# Altium PCB Ventilator.PcbDoc (part 1 of 2)
Units mm, origin at the board's own origin, x right, y up, seen from the top; angles counter-clockwise.
Board outline 121 x 71 mm, 4 copper layers (Top Layer, Int1 (GND), Int2 (PWR), Bottom Layer), stack 1.454 mm thick; 107 components, 73 nets, 431 pads, 141 vias.
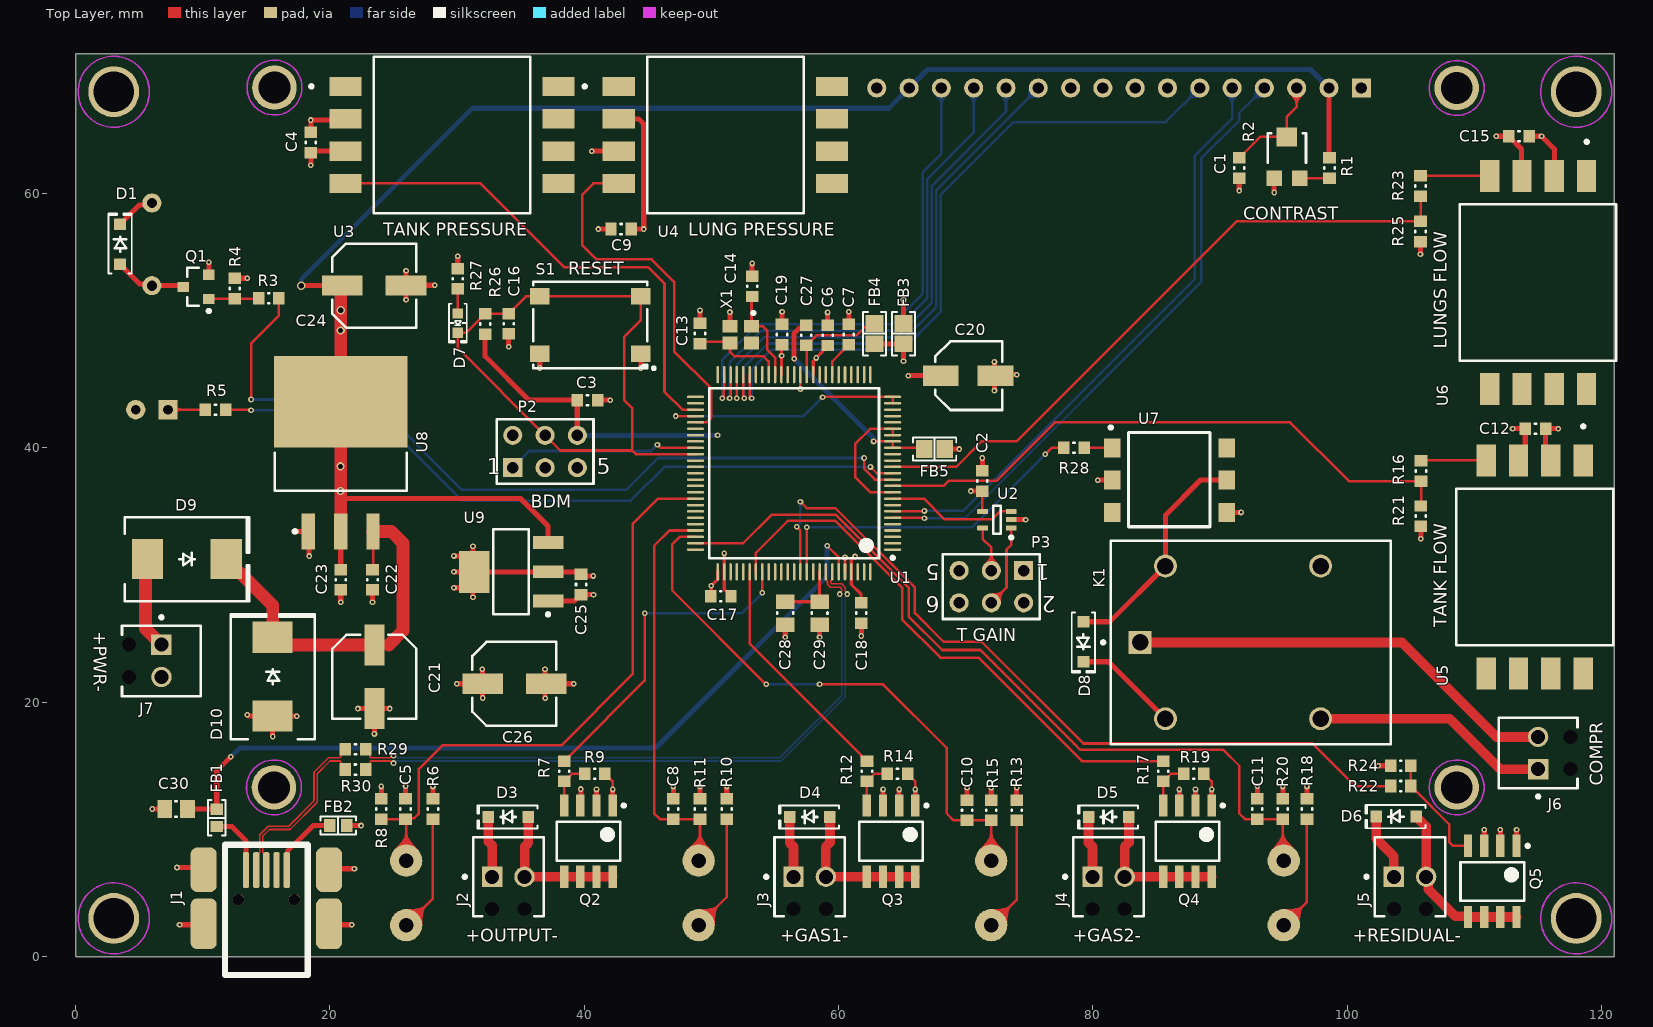
[diagram p0: Top Layer view]
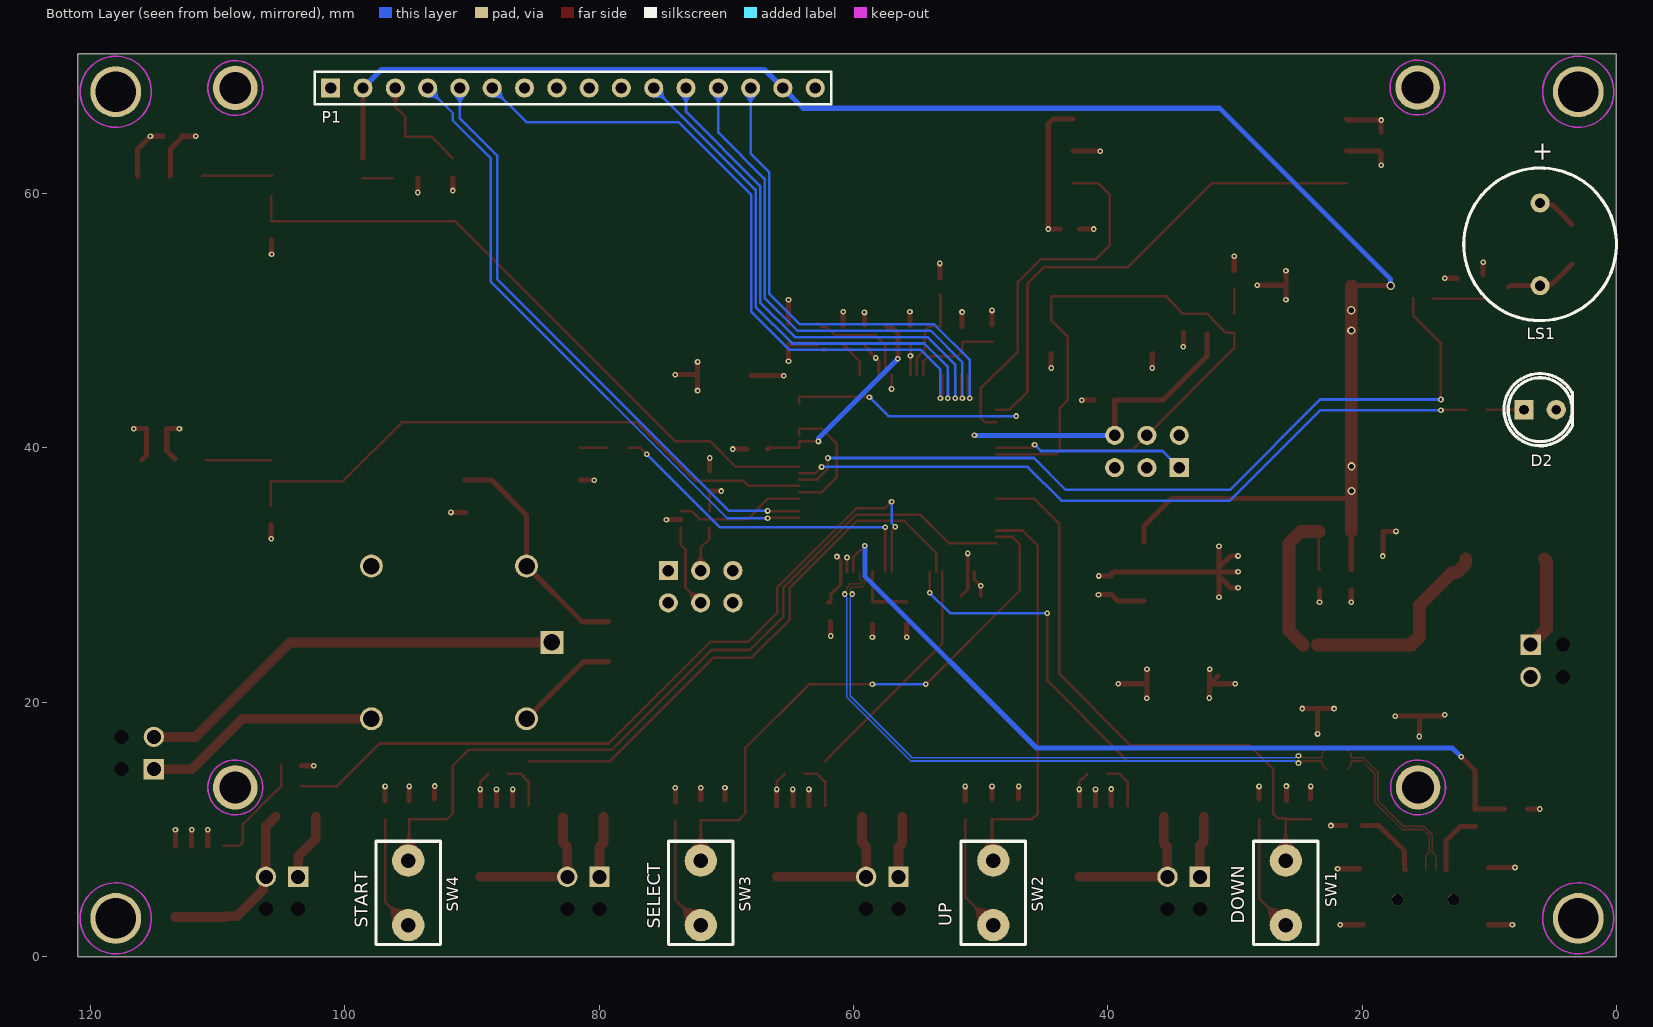
[diagram p1: Bottom Layer view, seen from below]
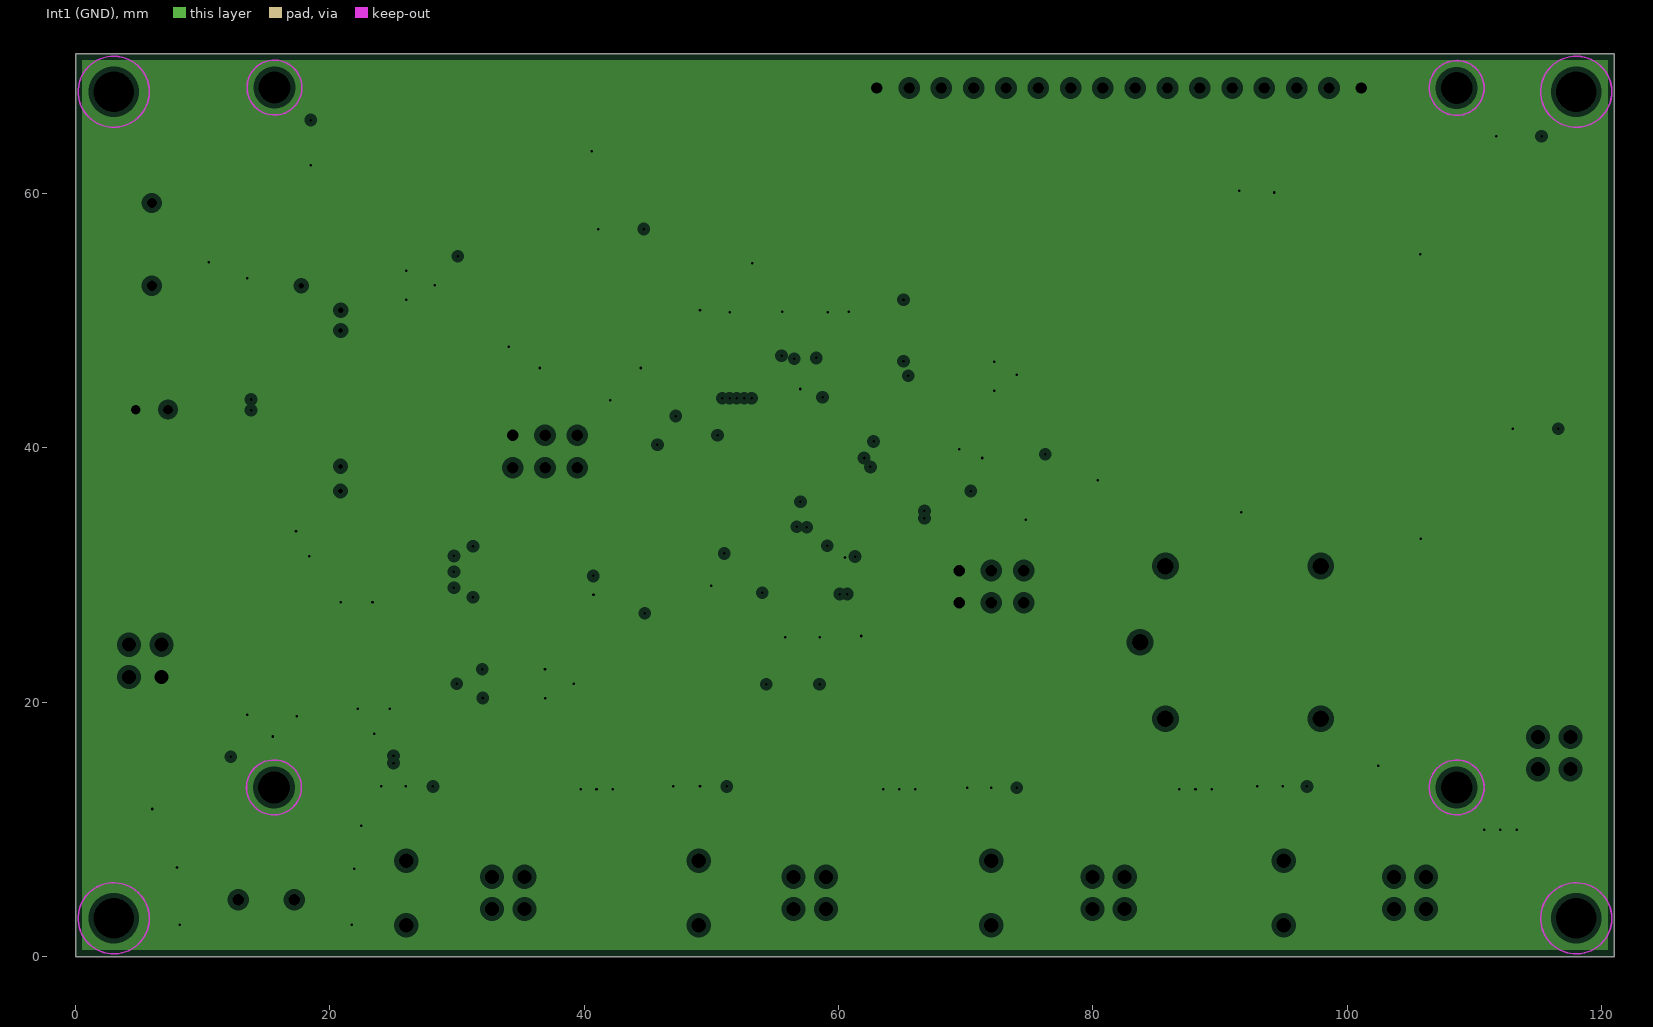
[diagram p2: Int1 (GND), clearances drawn from the general rule]
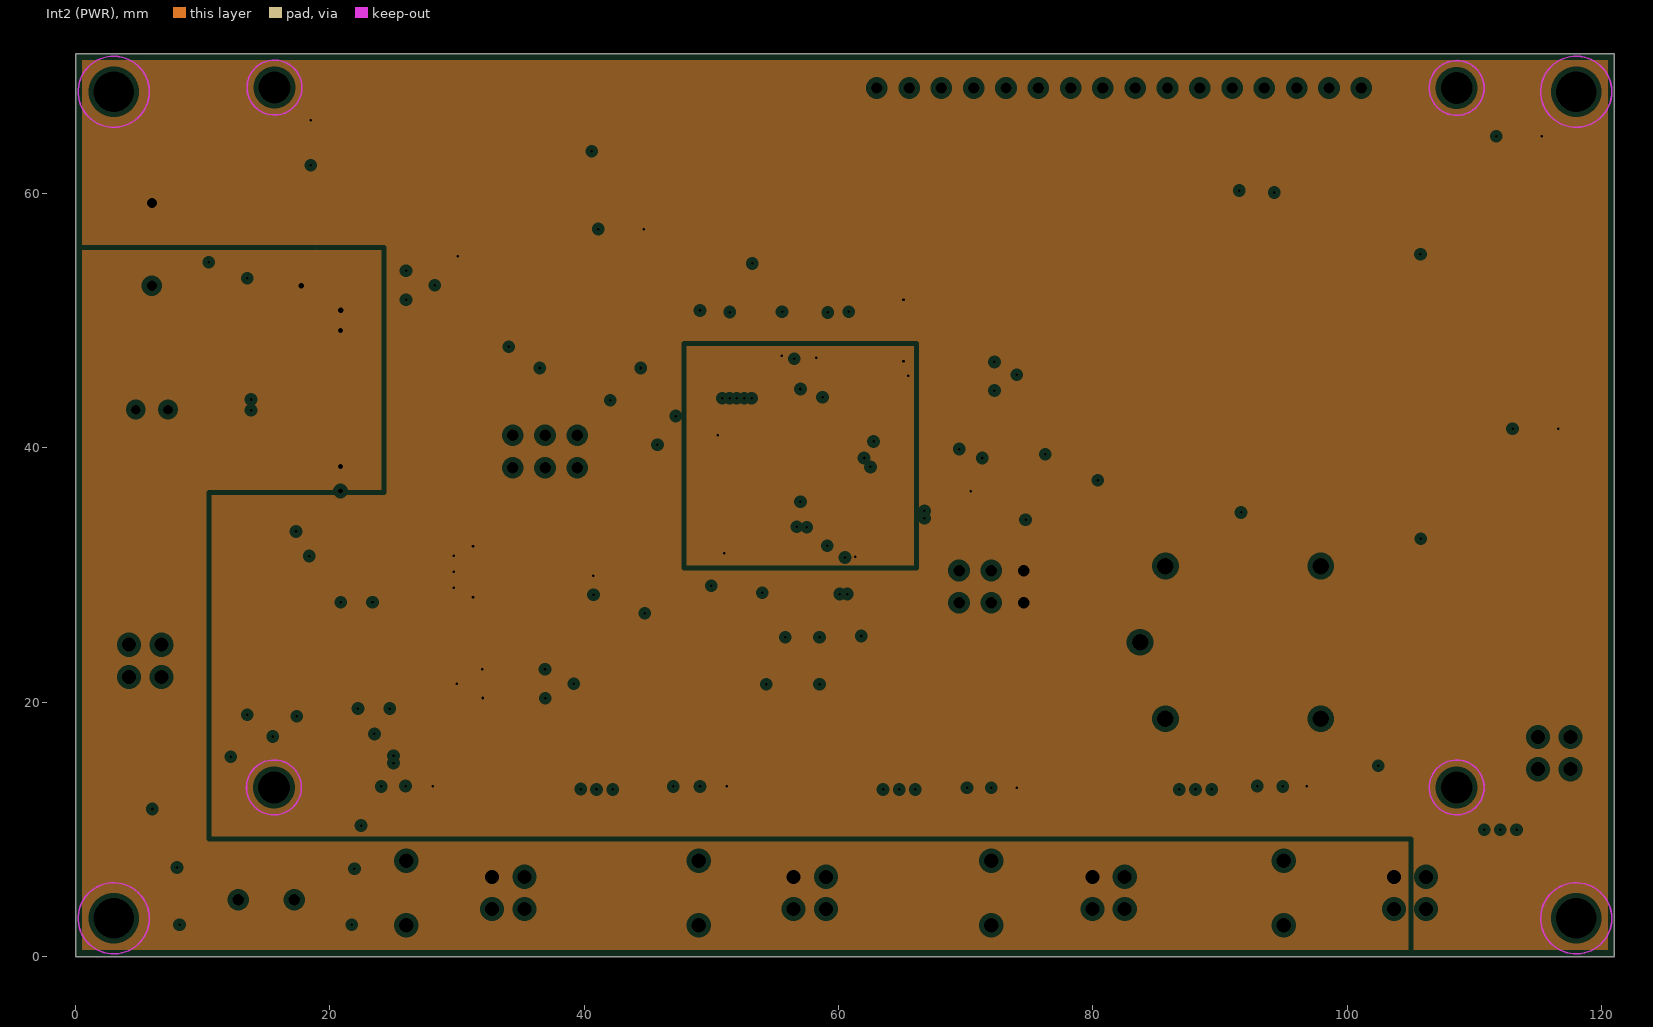
[diagram p3: Int2 (PWR), clearances drawn from the general rule]
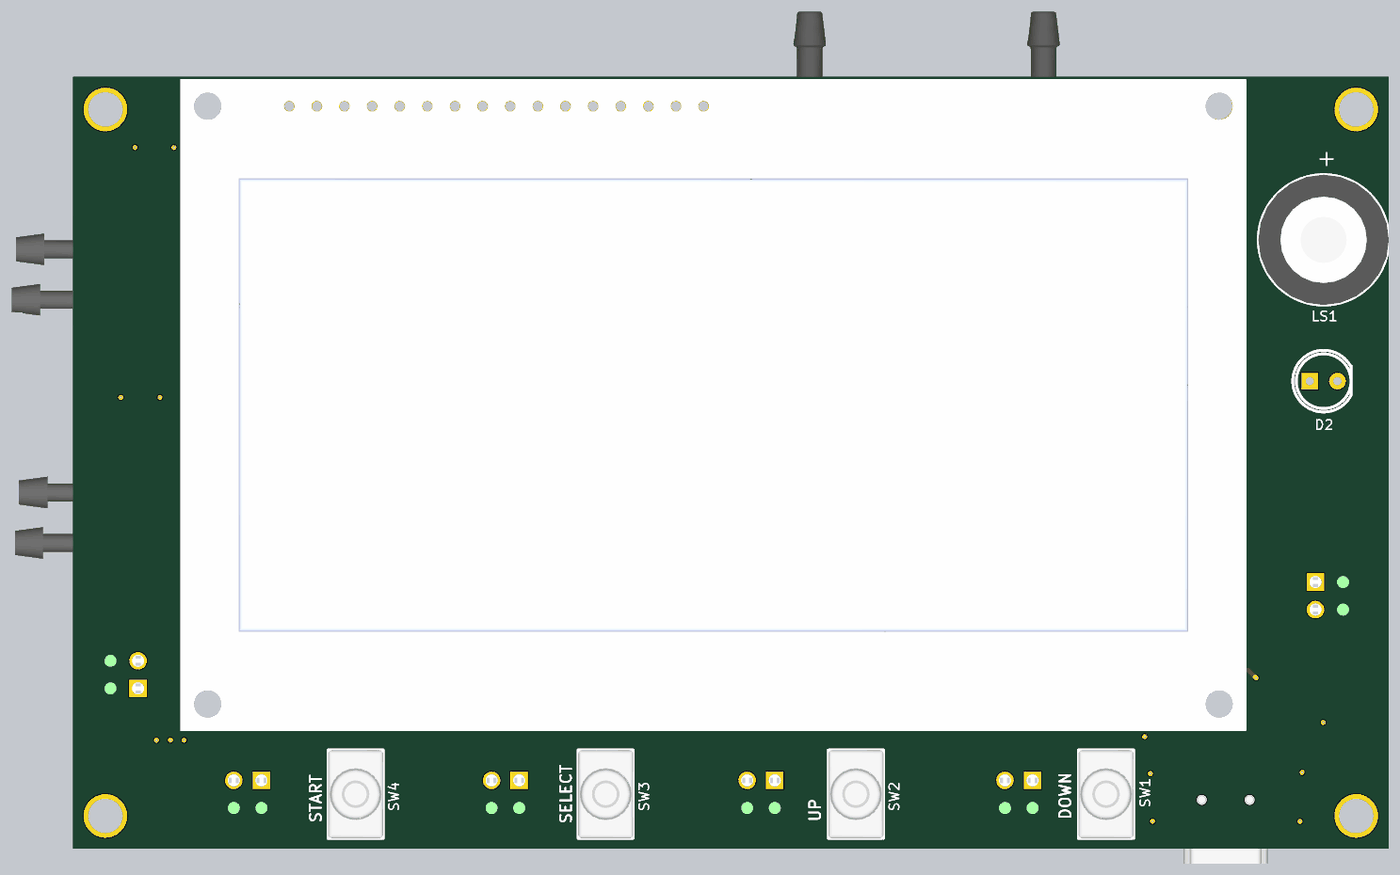
[diagram p5: 3D render of the assembled board from below, using the file's embedded part models]

## Layer stack, top to bottom
Top Solder: solder mask 0.0254, SM-001, Dk 4
Top Layer: signal copper 0.017
Dielectric 1: prepreg 0.11, PP-017, Dk 4.29
Int1 (GND): plane copper 0.035, net GND
Dielectric 3: core 1.13, Core-039, Dk 3.96
Int2 (PWR): plane copper 0.035, net (Multiple Nets)
Dielectric 5: prepreg 0.11, PP-017, Dk 4.29
Bottom Layer: signal copper 0.017
Bottom Solder: solder mask 0.0254, SM-001, Dk 4

## Board outline
0,0 0,71 121,71 121,0

## Design rules (kind name [scope] priority, off if disabled: settings)
Clearance [All] p1: gap=0.127 ignorepadtopadclearanceinfootprint=FALSE except(0: Arc-Hole Track-Hole SMDPad-Hole THPad-Hole Via-Hole Fill-Hole Poly-Hole Region-Hole Text-Hole)
ComponentClearance LEDClearance [HasFootprint('LED T-13/4')] p1: gap=0 collisioncheckmode=3 verticalgap=0 showdistances=FALSE
ComponentClearance [All] p2: gap=0.254 collisioncheckmode=3 verticalgap=0.254 showdistances=FALSE
DiffPairsRouting Diff_USB_ID [InDifferentialPair('USB_ID')] p1: maxlimit=0.127 minlimit=0.127 mostfreqgap=0.127 toplayer_minwidth=0.131 toplayer_maxwidth=0.154 toplayer_prefwidth=0.154 bottomlayer_minwidth=0.131 bottomlayer_maxwidth=0.154 bottomlayer_prefwidth=0.154 impedanceprofiledriven=TRUE impedanceprofileid={9005915C-958C-452F-89B8-649AF9CD579F} impedanceprofilevalue=90.000000 maxuncoupledlength=12.7
DiffPairsRouting Diff_USB [InDifferentialPair('USB')] p2: maxlimit=0.127 minlimit=0.127 mostfreqgap=0.127 toplayer_minwidth=0.131 toplayer_maxwidth=0.154 toplayer_prefwidth=0.154 bottomlayer_minwidth=0.131 bottomlayer_maxwidth=0.154 bottomlayer_prefwidth=0.154 impedanceprofiledriven=TRUE impedanceprofileid={9005915C-958C-452F-89B8-649AF9CD579F} impedanceprofilevalue=90.000000 maxuncoupledlength=12.7
DiffPairsRouting [All] p3: maxlimit=0.254 minlimit=0.254 mostfreqgap=0.254 toplayer_minwidth=0.381 toplayer_maxwidth=0.381 toplayer_prefwidth=0.381 bottomlayer_minwidth=0.381 bottomlayer_maxwidth=0.381 bottomlayer_prefwidth=0.381 maxuncoupledlength=12.7
PlaneClearance [All] p1: clearance=0.4
PlaneConnect [All] p1: pad.planeconnectstyle=Relief pad.reliefexpansion=0.508 pad.reliefentries=4 pad.reliefconductorwidth=0.254 pad.reliefairgap=0.254 via.planeconnectstyle=Direct via.reliefexpansion=0.508 via.reliefentries=4 via.reliefconductorwidth=0.254 via.reliefairgap=0.254
PolygonConnect [All] p1: connectstyle=Relief reliefconductorwidth=0.254 reliefentries=4 polygonreliefangle="90 Angle" airgapwidth=0.254
RoutingVias [All] p1: holewidth=0.2 width=0.45 viastyle="Through Hole" minholewidth=0.2 minwidth=0.45 maxholewidth=0.5 maxwidth=1
SolderMaskExpansion Via_Expansion [IsVia] p1: expansion=-1 istentingtop=FALSE
SolderMaskExpansion [All] p2: expansion=0.102 istentingtop=FALSE
Width SW_PWR [InNetClass('SW_PWR')] p1: maxlimit=0.768 minlimit=0.4 preferedwidth=0.768
Width LV_PWR [InNetClass('LV Pwr')] p2: maxlimit=1 minlimit=0.2 preferedwidth=0.4
Width [All] p3: maxlimit=1 minlimit=0.2 preferedwidth=0.2
26 further rules are at their usual default settings.

## Classes and differential pairs
net class DIFF90: USB_ID_N USB_ID_P USB_N USB_P
net class SW_PWR: NetD3_1 NetD4_1 NetD5_1 NetD6_1 NetJ6_1 NetJ6_2
net class "LV Pwr": +3V3 +5V AGND GND MCU3V3 NetD8_1 NetFB1_1 NetFB2_1 V_USB_BUS
differential pair USB: +USB_P -USB_N
differential pair USB_ID: +USB_ID_P -USB_ID_N

## Components (designator, comment, footprint, x,y, rotation, side; value= is the part's Value field where it differs from the comment)
C1 "100nF" CAPC0603(1608)100_N 91.5,62 r270 top
C2 "100nF" CAPC0603(1608)100_N 71.3,37.4 r90 top
C3 "100nF" CAPC0603(1608)100_N 40.25,43.75 r0 top
C4 "100nF" CAPC0603(1608)100_N 18.5,64 r270 top
C5 "100nF" CAPC0603(1608)100_N 25.946,11.6 r90 top
C6 "100nF" CAPC0603(1608)100_N 59.134,48.847 r90 top
C7 "100nF" CAPC0603(1608)100_N 60.8,48.9 r90 top
C8 "100nF" CAPC0603(1608)100_N 47,11.6 r90 top
C9 "100nF" CAPC0603(1608)100_N 42.9,57.2 r180 top
C10 "100nF" CAPC0603(1608)100_N 70.1,11.5 r90 top
C11 "100nF" CAPC0603(1608)100_N 92.927,11.6 r90 top
C12 "100nF" CAPC0603(1608)100_N 114.792,41.503 r180 top
C13 "12pF" CAPC0603(1608)100_N 49.1,49 r90 top
C14 "12pF" CAPC0603(1608)100_N 53.2,52.7 r90 top
C15 "100nF" CAPC0603(1608)100_N 113.5,64.5 r180 top
C16 "100nF" CAPC0603(1608)100_N 34.057,49.754 r270 top
C17 "100nF" CAPC0603(1608)100_N 50.736,28.329 r180 top
C18 "100nF" CAPC0603(1608)100_N 61.789,27.003 r270 top
C19 "100nF" CAPC0603(1608)100_N 55.55,48.9 r90 top
C20 "10µF" "CAP ALSMD 5.3MM H5.4MM" 70.183,45.672 r0 top
C21 "47µF" "CAP ALSMD 6.6MM H6.1MM" 23.5,22 r270 top
C22 "100nF" CAPC0603(1608)100_N 23.349,29.627 r270 top
C23 "100nF" CAPC0603(1608)100_N 20.849,29.627 r270 top
C24 "47µF" "CAP ALSMD 6.6MM H6.1MM" 23.48,52.758 r0 top
C25 "100nF" CAPC0603(1608)100_N 39.75,29.25 r270 top
C26 "47µF" "CAP ALSMD 6.6MM H6.1MM" 34.508,21.445 r0 top
C27 "100nF" CAPC0603(1608)100_N 57.45,48.85 r90 top
C28 "4.7uF 16V" CAPC0805(2012)145_N 55.8,27 r90 top value=4.7uF
C29 "470nF" CAPC0805(2012)145_N 58.5,27 r90 top
C30 "4.7uF 16V" CAPC0805(2012)145_N 7.9,11.6 r0 top value=4.7uF
D1 "SBR80520LT1G" SOD-123 3.5,56 r90 top
D2 "TLHK5800" "LED T-13/4" 6,43 r0 bottom locked
D3 "SBR80520LT1G" SOD-123 34.027,10.97 r180 top
D4 "SBR80520LT1G" SOD-123 57.727,10.97 r180 top
D5 "SBR80520LT1G" SOD-123 81.227,10.97 r180 top
D6 "SBR80520LT1G" SOD-123 103.838,11.001 r180 top
D7 "Yellow" "LED 0603_1608 YELLOW" 30.057,49.804 r270 top
D8 "SBR80520LT1G" SOD-123 79.25,24.75 r270 top
D9 "S8MC-13" "DO214AB SMC" 8.75,31.25 r0 top
D10 "SMCJ13A-13-F" "DO214AB SMC" 15.5,22 r90 top
FB1 "270 Ohms @ 100MHz" "FER 0603_1608" 11.1,10.9 r90 top
FB2 "270 Ohms @ 100MHz" "FER 0603_1608" 20.65,10.3 r0 top
FB3 "220 Ohms @ 100MHz" "FER 0805_2012" 65.103,48.974 r270 top
FB4 "220 Ohms @ 100MHz" "FER 0805_2012" 62.817,48.974 r270 top
FB5 "220 Ohms @ 100MHz" "FER 0805_2012" 67.55,39.9 r0 top
J1 "67503-1020" MOLX-67503-1020_V 13.4,6.8 r90 top
J2 "1725656" PHOE-1725656-2 34.027,6.27 r0 top
J3 "1725656" PHOE-1725656-2 57.727,6.27 r0 top
J4 "1725656" PHOE-1725656-2 81.227,6.27 r0 top
J5 "1725656" PHOE-1725656-2 104.927,6.27 r0 top
J6 "1725656" PHOE-1725656-2 115,16 r90 top
J7 "1725656" PHOE-1725656-2 6.75,23.25 r270 top
K1 "JSM1-12V-5" PNSC-JSM1-12V-5_V 92.4,24.7 r0 top
LS1 "CSQG703BP" CSQG703BP 6,56 r90 bottom
P1 "Header 16" NHD-0420DZ-FSW-FBW 101.1,68.295 r180 bottom
P2 "Header 3X2" HDR2X3 34.376,38.444 r0 top
P3 "Header 3X2" HDR2X3 74.55,30.35 r180 top
Q1 "MMBTA06-7-F" DIOD-SOT23-3_V 9.477,52.657 r180 top
Q2 "FDS6690A" FAIR-SOIC-8_V 40.327,9.07 r270 top
Q3 "FDS6690A" FAIR-SOIC-8_V 64.127,9.07 r270 top
Q4 "FDS6690A" FAIR-SOIC-8_V 87.427,9.07 r270 top
Q5 "FDS6690A" FAIR-SOIC-8_V 111.4,5.9 r270 top
R1 "10K" RESC0603(1608)_N 98.6,62 r270 top value="10000.00 Ohm"
R2 "10K" "POT BOURNS TRIMPOT TC33" 95.25,63 r0 top
R3 "330R" RESC0603(1608)_N 15.192,51.768 r180 top value="330.00 Ohm"
R4 "10K" RESC0603(1608)_N 12.525,52.53 r90 top value="10000.00 Ohm"
R5 "220R" RESC0603(1608)_N 11,43 r180 top value="220.00 Ohm"
R6 "330R" RESC0603(1608)_N 28.1,11.6 r90 top value="330.00 Ohm"
R7 "100R" RESC0603(1608)_N 38.427,14.57 r270 top value="100.00 Ohm"
R8 "10K" RESC0603(1608)_N 24.046,11.6 r270 top value="10000.00 Ohm"
R9 "10K" RESC0603(1608)_N 40.827,14.37 r0 top value="10000.00 Ohm"
R10 "330R" RESC0603(1608)_N 51.2,11.6 r90 top value="330.00 Ohm"
R11 "10K" RESC0603(1608)_N 49.1,11.6 r270 top value="10000.00 Ohm"
R12 "100R" RESC0603(1608)_N 62.227,14.57 r270 top value="100.00 Ohm"
R13 "330R" RESC0603(1608)_N 74,11.5 r90 top value="330.00 Ohm"
R14 "10K" RESC0603(1608)_N 64.627,14.37 r0 top value="10000.00 Ohm"
R15 "10K" RESC0603(1608)_N 72,11.5 r270 top value="10000.00 Ohm"
R16 "169K" RESC0603(1608)_N 105.792,38.174 r90 top value="169000.00 Ohm"
R17 "100R" RESC0603(1608)_N 85.527,14.57 r270 top value="100.00 Ohm"
R18 "330R" RESC0603(1608)_N 96.827,11.6 r90 top value="330.00 Ohm"
R19 "10K" RESC0603(1608)_N 87.927,14.37 r0 top value="10000.00 Ohm"
R20 "10K" RESC0603(1608)_N 94.927,11.6 r270 top value="10000.00 Ohm"
R21 "330K" RESC0603(1608)_N 105.783,34.627 r90 top value="330000.00 Ohm"
R22 "100R" RESC0603(1608)_N 104.2,13.4 r0 top value="100.00 Ohm"
R23 "169K" RESC0603(1608)_N 105.759,60.576 r90 top value="169000.00 Ohm"
R24 "10K" RESC0603(1608)_N 104.2,15 r180 top value="10000.00 Ohm"
R25 "330K" RESC0603(1608)_N 105.75,57 r90 top value="330000.00 Ohm"
R26 "10K" RESC0603(1608)_N 32.21,49.736 r270 top value="10000.00 Ohm"
R27 "330R" RESC0603(1608)_N 30.051,53.292 r270 top value="330.00 Ohm"
R28 "180R" RESC0603(1608)_N 78.5,40 r0 top value="180.00 Ohm"
R29 "22R" RESC0603(1608)_N 22,16.3 r0 top value="22.00 Ohm"
R30 "22R" RESC0603(1608)_N 22,14.7 r0 top value="22.00 Ohm"
S1 "B3S-1000P" "OMRON B3S-1000P" 40.465,49.609 r180 top
SW1 "EP11SD1CBE" EP11SD1CBE 26,5 r180 bottom
SW2 "EP11SD1CBE" EP11SD1CBE 49,5 r180 bottom
SW3 "EP11SD1CBE" EP11SD1CBE 72,5 r180 bottom
SW4 "EP11SD1CBE" EP11SD1CBE 95,5 r180 bottom
U1 "MCF51MM256CLL" TSQFP50P1600X1600X140-100N 56.5,38 r180 top
U2 "LM94021BIMG" DCK0005A_N 72.45,34.35 r180 top
U3 "MP3V5050GP" NXP_Semiconductor_98ASA99303D_MFG 29.6,64.6 r0 top
U4 "MP3V5050GP" NXP_Semiconductor_98ASA99303D_MFG 51.1,64.6 r0 top
U5 "MPXV7025DP" MPXVxxxxDP 114.733,30.627 r270 top
U6 "MPXV7025DP" MPXVxxxxDP 115,53 r270 top
U7 "4N35" SMD-6 81.5,40 r270 top
U8 "LM1085ISX-5.0/NOPB" KTT0003B_N 20.849,39.627 r90 top
U9 "LD1117S33CTR" SOT-223_N 34.25,30.25 r180 top
X1 "CX2520DB16000D0GEJCC" AVX-CX2520DB_V 52.3,48.9 r180 top

## Footprints (in the part's own frame and the unit in brackets; to place one, negate y for a bottom-side part, rotate by r counter-clockwise, add the part's x,y. Pads: shape width x height; smd on the part's side, far side on the other; paste and mask are expansions set on the pad)
AVX-CX2520DB_V [mm] "SMD, 4-Leads, Body 2.5x2mm, Pitch 1.7mm"
  rect 1.2x1 smd: 1(-0.85,-0.65) 2(0.85,-0.65) 3(0.85,0.65) 4(-0.85,0.65)
  silkscreen extent -1.13,-1.82 -0.88,-1.58, body extent -1.25,-1 1.25,1, height 0.55
"CAP ALSMD 5.3MM H5.4MM" [mm] "Aluminum Electrolytic Capacitor, Body 5.30x5.30x5.40mm, IPC Low Density"
  rect 2.8x1.6 smd: 1(-2.15,0) 2(2.15,0)
  silkscreen extent -2.6,-2.7 2.7,2.7, body extent -2.95,-2.7 2.95,2.7, height 5.4
"CAP ALSMD 6.6MM H6.1MM" [mm] "Aluminum Electrolytic Capacitor, Body 6.60x6.60x6.10mm, IPC Low Density"
  rect 3.2x1.6 smd: 1(-2.5,0) 2(2.5,0)
  silkscreen extent -3.3,-3.3 3.3,3.3, body extent -3.5,-3.3 3.5,3.3, height 6.1
CAPC0603(1608)100_N [mm] "Chip Capacitor, Body 1.6x0.8mm, Height 1.0mm, IPC Medium Density"
  rect 0.9x1 smd: 1(-0.8,0) 2(0.8,0)
  silkscreen extent -0.05,-0.4 0.05,0.4, body extent -0.87,-0.48 0.88,0.47, height 1
CAPC0805(2012)145_N [mm] "Chip Capacitor, Body 2.0x1.2mm, Height 1.45mm, IPC Medium Density"
  rect 1.15x1.45 smd: 1(-0.9,0) 2(0.9,0)
  silkscreen extent -0.05,-0.62 0.05,0.63, body extent -1.1,-0.72 1.1,0.73, height 1.45
CSQG703BP [mm]
  round 1.5 hole 0.8 paste+0: 1(3.25,0) 2(-3.25,0)
  silkscreen extent -6,-6 6,6, body extent -6,-6 6,6, height 3.8
DCK0005A_N [mm] "SOT23, 5-Leads, Body 2.15x1.4mm, Pitch 0.65mm, IPC Medium Density"
  rrect25% 0.85x0.4 smd: 1(-1.125,0.65) 2(-1.125,0) 3(-1.125,-0.65) 4(1.125,-0.65) 5(1.125,0.65)
  silkscreen extent -1.25,-1.1 0.3,1.52, body extent -1.14,-1 1.14,1, height 0.94
DIOD-SOT23-3_V [mm] "SOT23, 3-Leads, Body 3x1.4mm, Pitch 0.95mm"
  rect 0.9x0.8 smd: 1(-1,0.95) 2(-1,-0.95) 3(1,0)
  silkscreen extent -1.13,-1.5 0.7,2.02, body extent -1.25,-1.5 1.25,1.5, height 1.1
"DO214AB SMC" [mm] "Molded Diode, 2-Leads, Body 6.85x5.90mm, IPC Medium Density"
  rect 2.45x3.15 smd: 1(-3.1,0) 2(3.1,0)
  silkscreen extent -4.9,-3.3 4.9,3.3, body extent -3.97,-2.95 3.97,2.95, height 2.6
EP11SD1CBE [mil]
  round 100 hole 45 paste+0: 1(0,100) 2(0,-100)
  silkscreen extent -100,-160 100,160, body extent -100,-160 100,160, height 743
FAIR-SOIC-8_V [mm] "SOIC, 8-Leads, Body 5x4mm, Pitch 1.27mm"
  rect 1.75x0.65 smd: 1(-2.8,1.905) 2(-2.8,0.635) 3(-2.8,-0.635) 4(-2.8,-1.905) 5(2.8,-1.905) 6(2.8,-0.635) 7(2.8,0.635) 8(2.8,1.905)
  silkscreen extent -2.92,-2.5 1.53,2.91, body extent -3,-2.5 3,2.5, height 1.75
"FER 0603_1608" [mm] "Chip Ferrite, 2-Leads, Body 1.60x0.80mm, IPC Medium Density"
  rect 0.9x1 smd: 1(-0.675,0) 2(0.675,0)
  silkscreen extent -1.4,-0.7 1.4,0.7, body extent -0.8,-0.41 0.8,0.41, height 0.82
"FER 0805_2012" [mm] "Chip Ferrite, 2-Leads, Body 2.00x1.20mm, IPC Medium Density"
  rect 1.3x1.4 smd: 1(-0.8,0) 2(0.8,0)
  silkscreen extent -1.7,-0.9 1.7,0.9, body extent -1,-0.64 1,0.64, height 1.26
HDR2X3 [mm] "Connector; Header; 3x2 Position"
  rect 1.5x1.5 hole 0.9: 1(0,0)
  round 1.5 hole 0.9: 2(0,2.54) 3(2.54,0) 4(2.54,2.54) 5(5.08,0) 6(5.08,2.54)
  silkscreen extent -1.27,-1.27 6.35,3.81
KTT0003B_N [mm] "D2-PAK, 3-Leads, Body 10.41x8.89mm, Pitch 2.54mm, IPC Medium Density"
  rect 2.85x1.05 smd: 1(-6.2,2.54) 2(-6.2,0) 3(-6.2,-2.54)
  rect 7.2x10.5 smd: 4(4,0)
  silkscreen extent -6.32,-5.2 0,5.2, body extent -6.78,-5.2 7.57,5.2, height 4.64
"LED 0603_1608 YELLOW" [mm] "Chip Diode, 2-Leads, Body 1.60x0.80mm, IPC Medium Density"
  rect 0.8x0.8 smd: 1(-0.75,0) 2(0.75,0)
  silkscreen extent -1.52,-0.7 1.52,0.7, body extent -0.8,-0.4 0.8,0.4, height 0.53
"LED T-13/4" [mil] "LED 5MM"
  rect 60x60 hole 30: 1(50,0)
  round 60 hole 30: 2(-50,0)
  silkscreen extent -100,-112 112,112
MOLX-67503-1020_V [mm] "Mini USB Connector, SMT, Righer Angle"
  rrect50% 2.8x0.5 smd: 1(0,0) 2(0,-0.8) 3(0,-1.6) 4(0,-2.4) 5(0,-3.2)
  rrect50% 3.5x2.05 smd: 6(0.025,3.325) 8(0.025,-6.525)
  rrect50% 4x2.05 smd: 7(-4.225,3.325) 9(-4.225,-6.525)
  round 0.9 hole 0.9 unplated: X(-2.325,-3.8) Y(-2.325,0.6)
  silkscreen extent -8.25,-4.85 2,1.65, body extent -8.22,-6.56 0.78,3.34, height 3.95
MPXVxxxxDP [mm]
  rect 2.54x1.52 smd paste+0 mask+0: 1(-8.38,3.81) 2(-8.38,1.27) 3(-8.38,-1.27) 4(-8.38,-3.81) 5(8.38,-3.81) 6(8.38,-1.27) 7(8.38,1.27) 8(8.38,3.81)
  silkscreen extent -11.18,-6.16 6.16,6.16, body extent -8.69,-5.99 8.46,11.61, height 8.01
NHD-0420DZ-FSW-FBW [mm] "OLED DISPLAY"
  rect 1.5x1.5 hole 0.9: 1(0,0)
  round 1.5 hole 0.9: 2(2.54,0) 3(5.08,0) 4(7.62,0) 5(10.16,0) 6(12.7,0) 7(15.24,0) 8(17.78,0) 9(20.32,0) 10(22.86,0) 11(25.4,0) 12(27.94,0) 13(30.48,0) 14(33.02,0) 15(35.56,0) 16(38.1,0)
  silkscreen extent -1.27,-1.27 39.37,1.27, body extent -10,-57.5 88,2.5, height 14.07
NXP_Semiconductor_98ASA99303D_MFG [mm]
  rect 2.54x1.52 smd paste+0 mask+0: 1(-8.38,3.81) 2(-8.38,1.27) 3(-8.38,-1.27) 4(-8.38,-3.81) 5(8.38,-3.81) 6(8.38,-1.27) 7(8.38,1.27) 8(8.38,3.81)
  silkscreen extent -11.18,-6.16 6.16,6.16, body extent -9.75,-6.26 9.75,12.73, height 0.25
"OMRON B3S-1000P" [mm] "B3S-1000P, 4 Pins, 6.6x6.6x4.3mm, 4.5mm Pitch"
  rect 1.55x1.3 smd: 1(-3.984,2.207) 2(3.966,2.207) 3(-3.984,-2.293) 4(3.966,-2.293)
  silkscreen extent -5.1,-3.45 4.49,3.46, body extent -4.51,-3.34 4.49,3.26, height 4.3
PHOE-1725656-2 [mm] "Connector, 2-Leads, Body 6.2x5.4mm, Pitch 2.54mm"
  rect 1.6x1.6 hole 1.1: 1(-1.27,0)
  round 1.6 hole 1.1: 2(1.27,0)
  round 0 hole 1.1 unplated: MH1(-1.27,-2.54) MH2(1.27,-2.54)
  silkscreen extent -3.54,-3.1 2.77,3.1, body extent -2.77,-3.1 2.77,3.1, height 9
PNSC-JSM1-12V-5_V [mm] "THD, 5-Leads, Body 22x16mm"
  rect 1.8x1.8 hole 1.3: 1(-8.7,0)
  round 1.8 hole 1.3: 2(-6.7,-6) 3(5.5,-6) 4(5.5,6) 5(-6.7,6)
  silkscreen extent -11.72,-8 11,8, body extent -11,-8 11,8, height 16.4
"POT BOURNS TRIMPOT TC33" [mm] "Bourns Trimpot TC33X-1 - Open Frame 3mm x 3.8mm x 1.2mm"
  rect 1.2x1.2 smd: 1(-1,-1.8) 3(1,-1.8)
  rect 1.6x1.5 smd: 2(0,1.45)
  silkscreen extent -1.5,-0.6 1.5,1.75, body extent -1.8,-1.91 1.8,1.95, height 1.15
RESC0603(1608)_N [mm] "Chip Resistor, Body 1.6x0.8mm, IPC Medium Density"
  rect 0.9x1 smd: 1(-0.8,0) 2(0.8,0)
  silkscreen extent -0.05,-0.4 0.05,0.4, body extent -0.85,-0.47 0.85,0.47, height 0.6
SMD-6 [mm] "Optocoupler"
  rect 1.5x1.3 smd: 1(0,0) 2(2.54,0) 3(5.08,0) 4(5.08,9.02) 5(2.54,9.02) 6(0,9.02)
  silkscreen extent -1.72,-0.22 6.2,7.7, body extent -1.14,-0.58 6.14,9.58, height 3.61
SOD-123 [mm] "SOD, 2-Leads, Body 1.55x3.70mm, IPC Medium Density"
  rect 0.9x0.95 smd: 1(-1.575,0) 2(1.575,0)
  silkscreen extent -2.3,-0.92 2.41,0.92, body extent -1.86,-0.78 1.86,0.77, height 1.35
SOT-223_N [mm] "SOT223, 4-Leads, Body 6.5x3.5mm, Pitch 2.3mm, Lead Span 7mm, IPC Medium Density"
  rect 2.4x1 smd: 1(-2.9,2.3) 2(-2.9,0) 3(-2.9,-2.3)
  rect 2.4x3.3 smd: 4(2.9,0)
  silkscreen extent -3.03,-3.35 1.4,3.47, body extent -1.85,-3.35 1.85,3.35, height 1.8
TSQFP50P1600X1600X140-100N [mm] "TSQFP, 100-Leads, Body 14.00x14.00mm, Pitch 0.50mm, IPC Medium Density"
  oval 1.35x0.2 smd: 1(-7.75,6) 2(-7.75,5.5) 3(-7.75,5) 4(-7.75,4.5) 5(-7.75,4) 6(-7.75,3.5) 7(-7.75,3) 8(-7.75,2.5) 9(-7.75,2) 10(-7.75,1.5) 11(-7.75,1) 12(-7.75,0.5) 13(-7.75,0) 14(-7.75,-0.5) 15(-7.75,-1) 16(-7.75,-1.5) 17(-7.75,-2) 18(-7.75,-2.5) 19(-7.75,-3) 20(-7.75,-3.5) 21(-7.75,-4) 22(-7.75,-4.5) 23(-7.75,-5) 24(-7.75,-5.5) 25(-7.75,-6) 51(7.75,-6) 52(7.75,-5.5) 53(7.75,-5) 54(7.75,-4.5) 55(7.75,-4) 56(7.75,-3.5) 57(7.75,-3) 58(7.75,-2.5) 59(7.75,-2) 60(7.75,-1.5) 61(7.75,-1) 62(7.75,-0.5) 63(7.75,0) 64(7.75,0.5) 65(7.75,1) 66(7.75,1.5) 67(7.75,2) 68(7.75,2.5) 69(7.75,3) 70(7.75,3.5) 71(7.75,4) 72(7.75,4.5) 73(7.75,5) 74(7.75,5.5) 75(7.75,6)
  oval 0.2x1.35 smd: 26(-6,-7.75) 27(-5.5,-7.75) 28(-5,-7.75) 29(-4.5,-7.75) 30(-4,-7.75) 31(-3.5,-7.75) 32(-3,-7.75) 33(-2.5,-7.75) 34(-2,-7.75) 35(-1.5,-7.75) 36(-1,-7.75) 37(-0.5,-7.75) 38(0,-7.75) 39(0.5,-7.75) 40(1,-7.75) 41(1.5,-7.75) 42(2,-7.75) 43(2.5,-7.75) 44(3,-7.75) 45(3.5,-7.75) 46(4,-7.75) 47(4.5,-7.75) 48(5,-7.75) 49(5.5,-7.75) 50(6,-7.75) 76(6,7.75) 77(5.5,7.75) 78(5,7.75) 79(4.5,7.75) 80(4,7.75) 81(3.5,7.75) 82(3,7.75) 83(2.5,7.75) 84(2,7.75) 85(1.5,7.75) 86(1,7.75) 87(0.5,7.75) 88(0,7.75) 89(-0.5,7.75) 90(-1,7.75) 91(-1.5,7.75) 92(-2,7.75) 93(-2.5,7.75) 94(-3,7.75) 95(-3.5,7.75) 96(-4,7.75) 97(-4.5,7.75) 98(-5,7.75) 99(-5.5,7.75) 100(-6,7.75)
  silkscreen extent -7.88,-6.68 6.68,6.77, body extent -8,-8 8,8, height 1.4

## Part data
C1 C2 C3 C4 C5 C6 C7 C8 C9 C10 C11 C12 C15 C16 C17 C18 C19 C22 C23 C25 C27: library part CMP-1035-02592-1, "CAP 100nF 50V ±10% 0603 (1608 Metric) Thickness 1mm SMD", Case-EIA=0603, Case-Metric=1608, Rated Voltage="50 V", Tolerance=Â±10%, Max Thickness="1 mm", Technology=SMT
C13 C14: library part CMP-1035-00616-1, "CAP 12pF 50V ±0.5pF 0603 (1608 Metric) Thickness 1mm SMD", Case-EIA=0603, Case-Metric=1608, Rated Voltage="50 V", Tolerance=Â±0.5pF, Max Thickness="1 mm", Technology=SMT
C20: library part EEE-1EA100SR, "CAP ALUM 10UF 20% 25V SMD", Device Package="Radial, Can - SMD", Lifetime @ Temp.="2000 Hrs @ 85°C", Manufacturer="Panasonic Electronic Components", Operating Temperature="-40°C ~ 85°C", Ratings=AEC-Q200, Ripple Current @ High Frequency="47.6mA @ 10kHz", Ripple Current @ Low Frequency="28mA @ 120Hz", Supplier Part Number 1=PCE3894CT-ND, Tolerance=±20%, Voltage - Rated=25V, Applications=Automotive, Capacitance=10µF, ComponentLink1Description=Datasheet, ComponentLink1URL=//media.digikey.com/pdf/Data%20Sheets/Panasonic%20Electronic%20Components/S_Series,Type_V_Rev2018.pdf, ComponentLink2Description="DigiKey Link", ComponentLink2URL=http://digikey.com/product-detail/en/panasonic-electronic-components/EEE-1EA100SR/PCE3894CT-ND/766270, Height - Seated (Max)="0.213\" (5.40mm)", LastUpdated="21/01/2020 4:04:23 AM", Lifecycle Status=Active, Minimum Order=1, Mounting Type="Surface Mount", Package / Case="Radial, Can - SMD", Packaging=TapeAndReel, Part Number=EEE-1EA100SR, Part Status=Active, PartId=7831, Polarization=Polar, Price=0.07, Series=S, Size / Dimension="0.197\" Dia (5.00mm)", Supplier 1=DigiKey, Surface Mount Land Size="0.209\" L x 0.209\" W (5.30mm x 5.30mm)"
C21 C24 C26: library part UWT1V470MCL1GS, "CAP ALUM 47UF 20% 35V SMD", Device Package="Radial, Can - SMD", Lifetime @ Temp.="1000 Hrs @ 105°C", Manufacturer=Nichicon, Operating Temperature="-55°C ~ 105°C", Ripple Current @ High Frequency="94.5mA @ 10kHz", Ripple Current @ Low Frequency="63mA @ 120Hz", Supplier Part Number 1=493-2202-1-ND, Tolerance=±20%, Voltage - Rated=35V, Applications="General Purpose", Capacitance=47µF, ComponentLink1Description=Datasheet, ComponentLink1URL=https://products.nichicon.co.jp/en/pdf/XJA043/e-uwt.pdf, ComponentLink2Description="DigiKey Link", ComponentLink2URL=http://digikey.com/product-detail/en/nichicon/UWT1V470MCL1GS/493-2202-1-ND/590177, Height - Seated (Max)="0.228\" (5.80mm)", LastUpdated="21/01/2020 2:33:38 AM", Lifecycle Status=Active, Minimum Order=1, Mounting Type="Surface Mount", Package / Case="Radial, Can - SMD", Packaging=TapeAndReel, Part Number=UWT1V470MCL1GS, Part Status=Active, PartId=8901, Polarization=Polar, Price=0.09, Series=UWT, Size / Dimension="0.248\" Dia (6.30mm)", Supplier 1=DigiKey, Surface Mount Land Size="0.260\" L x 0.260\" W (6.60mm x 6.60mm)"
C28 C30: library part CMP-1036-04891-1, "CAP 4.7uF 16V ±20% 0805 (2012 Metric) Thickness 1.45mm SMD", Case-EIA=0805, Case-Metric=2012, Rated Voltage="16 V", Tolerance=Â±20%, Max Thickness="1.45 mm", Technology=SMT
C29: library part CMP-1036-04654-1, "CAP 470nF 50V ±10% 0805 (2012 Metric) Thickness 1.45mm SMD", Case-EIA=0805, Case-Metric=2012, Rated Voltage="50 V", Tolerance=Â±10%, Max Thickness="1.45 mm", Technology=SMT
D1 D3 D4 D5 D6 D8: "DIODE SCHOTTKY 20V 500MA SOD123", Current - Average Rectified (Io)=500mA, Current - Reverse Leakage @ Vr="250µA @ 20V", Device Package=SOD-123, Manufacturer="ON Semiconductor", Operating Temperature - Junction="-65°C ~ 125°C", Supplier Part Number 1=SBR80520LT1GOSCT-ND, Voltage - DC Reverse (Vr) (Max)=20V, Voltage - Forward (Vf) (Max) @ If="385mV @ 500mA", ComponentLink1Description=Datasheet, ComponentLink1URL=http://www.onsemi.com/pub/Collateral/MBR0520LT1-D.PDF, ComponentLink2Description="DigiKey Link", ComponentLink2URL=http://digikey.com/product-detail/en/on-semiconductor/SBR80520LT1G/SBR80520LT1GOSCT-ND/5969271, Diode Type=Schottky, LastUpdated="21/01/2020 2:42:33 AM", Lifecycle Status=Active, Minimum Order=1, Mounting Type="Surface Mount", Package / Case=SOD-123, Packaging=TapeAndReel, Part Number=SBR80520LT1G, Part Status=Active, PartId=2307, Price=0.14, Series=-, Speed="Fast Recovery =< 500ns, > 200mA (Io)", Supplier 1=DigiKey, Supplier Device Package=SOD-123
D2: library part LED0, "T-13/4 LED", LatestRevisionDate=08-Jul-2005, LatestRevisionNote="Mech Layer 1 removed.", PackageDescription="LED; 2 Leads", PackageReference=LED-0, Published=8-Jun-2000, Publisher="Altium Limited"
D7: library part 5975223407F, "LED YELLOW DIFFUSED 0603 SMD", Current - Test=20mA, Device Package="0603 (1608 Metric)", Lens Color=White, Manufacturer=Dialight, Millicandela Rating=65mcd, Supplier Device Package=0603, Supplier Part Number 1=350-3032-1-ND, Voltage - Forward (Vf) (Typ)=1.9V, Color=Yellow, ComponentLink1Description=Datasheet, ComponentLink1URL=http://www.dialightsignalsandcomponents.com/Assets/Brochures_And_Catalogs/Indication/597-xxxx-4xx.pdf, ComponentLink2Description="DigiKey Link", ComponentLink2URL=http://digikey.com/product-detail/en/dialight/5975223407F/350-3032-1-ND/4079751, Configuration=Standard, Height (Max)=0.70mm, LastUpdated="21/01/2020 3:14:59 AM", Lens Size="1.10mm x 0.80mm", Lens Style="Rectangle with Flat Top", Lens Transparency=Diffused, Lifecycle Status=Active, Minimum Order=1, Mounting Type="Surface Mount", Package / Case="0603 (1608 Metric)", Packaging=TapeAndReel, Part Number=5975223407F, Part Status=Active, PartId=160, Price=0.69, Series=597, Size / Dimension="1.60mm L x 0.80mm W", Supplier 1=DigiKey, Viewing Angle=152°, Wavelength - Dominant=590nm, Wavelength - Peak=592nm
D9: "DIODE GEN PURP 1KV 8A SMC", Capacitance @ Vr, F="40pF @ 4V, 1MHz", Current - Average Rectified (Io)=8A, Current - Reverse Leakage @ Vr="10µA @ 1000V", Device Package="DO-214AB, SMC", Manufacturer="Diodes Incorporated", Operating Temperature - Junction="-65°C ~ 150°C", Supplier Device Package=SMC, Supplier Part Number 1=S8MCDICT-ND, Voltage - DC Reverse (Vr) (Max)=1000V, Voltage - Forward (Vf) (Max) @ If="985mV @ 8A", ComponentLink1Description=Datasheet, ComponentLink1URL=https://www.diodes.com/assets/Datasheets/ds31117.pdf, ComponentLink2Description="DigiKey Link", ComponentLink2URL=http://digikey.com/product-detail/en/diodes-incorporated/S8MC-13/S8MCDICT-ND/1774332, Diode Type=Standard, LastUpdated="21/01/2020 2:38:56 AM", Lifecycle Status=Active, Minimum Order=1, Mounting Type="Surface Mount", Package / Case="DO-214AB, SMC", Packaging=TapeAndReel, Part Number=S8MC-13, Part Status=Active, PartId=486, Price=0.24, Series=-, Speed="Standard Recovery >500ns, > 200mA (Io)", Supplier 1=DigiKey
D10: "TVS DIODE 13V 21.5V SMC", Current - Peak Pulse (10/1000µs)=69.7A, Device Package="DO-214AB, SMC", Manufacturer="Diodes Incorporated", Operating Temperature="-55°C ~ 150°C (TJ)", Power - Peak Pulse="1500W (1.5kW)", Power Line Protection=No, Supplier Device Package=SMC, Supplier Part Number 1=SMCJ13A-13-FDICT-ND, Voltage - Breakdown (Min)=14.4V, Voltage - Clamping (Max) @ Ipp=21.5V, Voltage - Reverse Standoff (Typ)=13V, Applications="General Purpose", ComponentLink1Description=Datasheet, ComponentLink1URL=https://www.diodes.com/assets/Datasheets/ds19003.pdf, ComponentLink2Description="DigiKey Link", ComponentLink2URL=http://digikey.com/product-detail/en/diodes-incorporated/SMCJ13A-13-F/SMCJ13A-13-FDICT-ND/775878, LastUpdated="21/03/2020 12:57:04 AM", Lifecycle Status=Active, Minimum Order=1, Mounting Type="Surface Mount", Package / Case="DO-214AB, SMC", Packaging=TapeAndReel, Part Number=SMCJ13A-13-F, Part Status=Active, PartId=6904, Price=0.27, Series=-, Supplier 1=DigiKey, Type=Zener, Unidirectional Channels=1
FB1 FB2: library part BKP1608HS271-T, "FERRITE BEAD 270 OHM 0603 1LN", Current Rating (Max)=1.2A, DC Resistance (DCR) (Max)=110mOhm, Device Package="0603 (1608 Metric)", Manufacturer="Taiyo Yuden", Operating Temperature="-55°C ~ 85°C", Supplier Part Number 1=587-1925-1-ND, ComponentLink1Description=Datasheet, ComponentLink1URL="https://ds.yuden.co.jp/TYCOMPAS/ut/detail?pn=BKP1608HS271-T  &u=M", ComponentLink2Description="DigiKey Link", ComponentLink2URL=http://digikey.com/product-detail/en/taiyo-yuden/BKP1608HS271-T/587-1925-1-ND/1465395, Filter Type="Power Line", Height (Max)="0.037\" (0.95mm)", Impedance @ Frequency="270 Ohms @ 100MHz", LastUpdated="21/01/2020 2:27:55 AM", Lifecycle Status=Active, Minimum Order=1, Mounting Type="Surface Mount", Number of Lines=1, Package / Case="0603 (1608 Metric)", Packaging=TapeAndReel, Part Number=BKP1608HS271-T, Part Status=Active, PartId=1028, Price=0.02, Series=BK, Size / Dimension="0.063\" L x 0.032\" W (1.60mm x 0.80mm)", Supplier 1=DigiKey
FB3 FB4 FB5: library part BLM21PG221SN1D, "FERRITE BEAD 220 OHM 0805 1LN", Current Rating (Max)=2A, DC Resistance (DCR) (Max)=45mOhm, Device Package="0805 (2012 Metric)", Manufacturer="Murata Electronics", Operating Temperature="-55°C ~ 125°C", Supplier Part Number 1=490-1054-1-ND, ComponentLink1Description=Datasheet, ComponentLink1URL=https://www.murata.com/en-us/products/en-us/products/productdata/8796738977822/ENFA0005.pdf, ComponentLink2Description="DigiKey Link", ComponentLink2URL=http://digikey.com/product-detail/en/murata-electronics/BLM21PG221SN1D/490-1054-1-ND/574418, Filter Type="Power Line", Height (Max)="0.041\" (1.05mm)", Impedance @ Frequency="220 Ohms @ 100MHz", LastUpdated="21/01/2020 2:29:16 AM", Lifecycle Status=Active, Minimum Order=1, Mounting Type="Surface Mount", Number of Lines=1, Package / Case="0805 (2012 Metric)", Packaging=TapeAndReel, Part Number=BLM21PG221SN1D, Part Status=Active, PartId=1360, Price=0.02, Series="EMIFIL®, BLM21", Size / Dimension="0.079\" L x 0.049\" W (2.00mm x 1.25mm)", Supplier 1=DigiKey
J1: library part CMP-0411-00002-1, "USB, MINI, SMD, RA KME04-USBMU03A01", Manufacturer=Molex, ComponentLink1Description="Manufacturer URL", ComponentLink1URL=http://www.molex.com/, ComponentLink2Description=Datasheet, ComponentLink2URL=http://www.molex.com/pdm_docs/sd/675031020_sd.pdf, DatasheetVersion="Rev F, 06/2009", Mounting Technology="Surface Mount", PackageDescription="Mini USB Connector, SMT, Righer Angle", PackageReference=67503-1020, PartNumber=67503-1020, Terminal Pitch="0.8 mm"
J2 J3 J4 J5 J6 J7: library part CMP-2000-05299-1, "Male Header, Pitch 2.54 mm, 1 x 2 Position, Height 9 mm, Tail Length 3.5 mm", Colour=Green, Manufacturer="Phoenix Contact", Content=250pc(s), Datasheet URL=http://datasheet.octopart.com/1725656-Phoenix-Contact-datasheet-5302866.pdf, Datasheet Version=Apr-08, Industrial packaging=Yes, Manufacturer part No.=1725656, Manufacturer URL=http://www.phoenixcontact.com/, Number of contacts=2, Pitch=2.54mm, Type=MPT0,5/2-2,54
K1: library part CMP-2000-06504-1, "Global Standard Terminal Pitch Automotive Power Relay, SPDT, 12 VDC, -40 to 85 degC, 5-Pin THD, RoHS, Bulk", Coil Current=53.3mA, Coil Operating Lower Percent Limit=53%, Coil Operating Upper Percent Limit=133%, Coil Resistance=225ohm, Coil Voltage VDC Nom=12V, Contact Current AC Max=15A, Contact Voltage DC Max=16V, DC Coil Power=640mW, Manufacturer=Panasonic, Operating Temperature Max=85°C, Operating Temperature Min=-40°C, Operating Time=10ms, Package Description="5-Pin Throuhe Hole Device, Body 22 x 16 mm", Switch Current Max=10A, Approval Bodies=CSA/TUV/UL, Coil Type=DC, Contact Configuration=SPDT, Contact Current DC Max=15A, Contact Current Max=15A, Contact Current Min=15A, Contact Material=SilverAlloy, Contact Voltage DC Nom=16V, Datasheet URL=https://datasheet.ciiva.com/14146/pxjs-m-relays-data-e-14146481.pdf, Datasheet Version=05/2007, External Depth=16mm, External Height=22mm, External Length / Height=22mm, External Width=16.4mm, Manufacturer URL=http://www.panasonic.com/, Mounting Technology=ThroughHole, Mounting Type=PCB, No. of Poles=1, Nom Operating Power=640mW, Package Reference=JSM1-12V-5, PCB Hole Diameter=1.3mm, Relay Mounting=ThroughHole, Relay Type=Power, Release Time=10ms, Series=JS-M, SVHC=NoSVHC(19-Dec-2012), Switching Current Max=10A
LS1: library part Speaker, "Loudspeaker", Supplier Part Number 1=102-1286-ND, LatestRevisionDate=17-Jul-2002, LatestRevisionNote="Re-released for DXP Platform.", PackageReference=PIN2, Published=24-Mar-1999, Publisher="Altium Limited", Supplier 1=Digi-Key
P1: "Header, 16-Pin", LatestRevisionDate=17-Jul-2002, LatestRevisionNote="Re-released for DXP Platform.", Publisher="Altium Limited"
P2 P3: "Header, 3-Pin, Dual row", LatestRevisionDate=17-Jul-2002, LatestRevisionNote="Re-released for DXP Platform.", Publisher="Altium Limited"
Q1: library part CMP-2000-06733-1, "NPN Small Signal Transistor, 80 V, -55 to 150 degC, 3-Pin SOT23, RoHS, Tape and Reel", Collector- Base Voltage VCBO=80V, Collector-Emitter Saturation Voltage=0.25V, Continuous Collector Current=0.5A, Emitter- Base Voltage VEBO=4V, Manufacturer=DiodesIncorporated, Maximum Operating Temperature=+150C, Minimum Operating Temperature=-55C, Package / Case=SOT-23, Package Description="3-Pin Small Outline Transistor, Body 2.9 x 1.3 mm, Pitch 0.96 mm", Package Reference=SOT23-3, Pd - Power Dissipation=300mW, Brand=DiodesIncorporated, Collector- Emitter Voltage VCEO Max=80V, Configuration=Single, Datasheet URL=http://www.diodes.com/_files/datasheets/ds30037.pdf, Datasheet Version="Rev. 14-2, 11/2013", DC Collector/Base Gain hfe Min=100, Factory Pack Quantity=3000, Gain Bandwidth Product fT=100MHz, Height=1mm, Length=3.05mm, Manufacturer URL=http://www.diodes.com/, Maximum DC Collector Current=0.5A, Mounting Style=SMD/SMT, Mounting Technology=SurfaceMount, Packaging=Reel, Product Category=BipolarTransistors-BJT, RoHS=True, Series=MMBTA06, Transistor Polarity=NPN, Unit Weight=0.000282oz, Width=1.4mm
Q2 Q3 Q4 Q5: library part CMP-2000-06260-1, "Single N-Channel, Logic-Level, PowerTrench(R) MOSFET, 11 A, 30 V, -55 to 150 degC, 8-Pin SOIC (SO-8), RoHS, Tape and Reel", Manufacturer="Fairchild Semiconductor", Maximum Continuous Drain Current=11A, Maximum Drain Source Resistance=0.013Ω, Maximum Drain Source Voltage=30V, Maximum Gate Source Voltage=±20V, Maximum Operating Temperature=+150°C, Maximum Power Dissipation=2.5W, Minimum Gate Threshold Voltage=1V, Minimum Operating Temperature=-55°C, Package Description="8-Pin Small Outline Integrated Circuit, Body 4.9 x 3.9 mm, Pitch 1.27 mm", Package Reference=SOIC-8, Package Type=SOIC, Typical Input Capacitance @ Vds=1205pF@15V, Category=PowerMOSFET, Channel Mode=Enhancement, Channel Type=N, Datasheet URL=https://www.fairchildsemi.com/datasheets/FD/FDS6690A.pdf, Datasheet Version="Rev. E1, 02/2007", Dimensions=5x4x1.5mm, Height=1.5mm, Length=5mm, Manufacturer URL=https://www.fairchildsemi.com/, Mounting Technology=SurfaceMount, Mounting Type=SurfaceMount, Number of Elements per Chip=1, Package URL=https://www.fairchildsemi.com/package-drawings/M0/M08A.pdf, Pin Count=8, Transistor Configuration=Single, Transistor Material=Si, Typical Gate Charge @ Vgs=12nC@5V, Typical Turn-Off Delay Time=28ns, Typical Turn-On Delay Time=9ns, Width=4mm
R1 R4 R8 R9 R11 R14 R15 R19 R20 R24 R26: library part CMP-1012-00098-1, "10K 0.1W 5% 0603 (1608 Metric)  SMD", Case-EIA=0603, Case-Metric=1608, Power="0.1 W", Tolerance="5 %", Technology=SMT
R2: library part TC33X-1-103E, "TRIMMER 10K OHM 0.1W J LEAD TOP", Manufacturer="Bourns Inc.", Power (Watts)="0.1W, 1/10W", Resistance="10 kOhms", Resistive Material=Cermet, Supplier Part Number 1=TC33X-1-103ECT-ND, Temperature Coefficient=±250ppm/°C, Tolerance=±25%, Adjustment Type="Top Adjustment", ComponentLink1Description=Datasheet, ComponentLink1URL=https://www.bourns.com/docs/Product-Datasheets/TC33.pdf, ComponentLink2Description="DigiKey Link", ComponentLink2URL=http://digikey.com/product-detail/en/bourns-inc/TC33X-1-103E/TC33X-1-103ECT-ND/7244463, LastUpdated="21/01/2020 3:20:18 AM", Lifecycle Status=Active, Minimum Order=1, Mounting Type="Surface Mount", Number of Turns=1, Packaging=TapeAndReel, Part Number=TC33X-1-103E, Part Status=Active, PartId=9, Price=0.15, Series="Trimpot® TC33 - Open Frame", Size / Dimension="Rectangular - 0.150\" x 0.142\" Face x 0.047\" H (3.80mm x 3.60mm x 1.20mm)", Supplier 1=DigiKey, Termination Style="J Lead"
R3 R6 R10 R13 R18 R27: library part CMP-1012-00062-1, "330R 0.1W 5% 0603 (1608 Metric)  SMD", Case-EIA=0603, Case-Metric=1608, Power="0.1 W", Tolerance="5 %", Technology=SMT
R5: library part CMP-1012-00058-1, "220R 0.1W 5% 0603 (1608 Metric)  SMD", Case-EIA=0603, Case-Metric=1608, Power="0.1 W", Tolerance="5 %", Technology=SMT
R7 R12 R17 R22: library part CMP-1012-00050-1, "100R 0.1W 5% 0603 (1608 Metric)  SMD", Case-EIA=0603, Case-Metric=1608, Power="0.1 W", Tolerance="5 %", Technology=SMT
R16 R23: library part CMP-1012-00760-1, "169K 0.1W 1% 0603 (1608 Metric)  SMD", Case-EIA=0603, Case-Metric=1608, Power="0.1 W", Tolerance="1 %", Technology=SMT
R21 R25: library part CMP-1012-00793-1, "330K 0.1W 1% 0603 (1608 Metric)  SMD", Case-EIA=0603, Case-Metric=1608, Power="0.1 W", Tolerance="1 %", Technology=SMT
R28: library part CMP-1012-00056-1, "180R 0.1W 5% 0603 (1608 Metric)  SMD", Case-EIA=0603, Case-Metric=1608, Power="0.1 W", Tolerance="5 %", Technology=SMT
R29 R30: library part CMP-1012-00034-1, "22R 0.1W 5% 0603 (1608 Metric)  SMD", Case-EIA=0603, Case-Metric=1608, Power="0.1 W", Tolerance="5 %", Technology=SMT
S1: "SWITCH TACTILE SPST-NO 0.05A 24V", Contact Rating @ Voltage="0.05A @ 24VDC", Manufacturer="Omron Electronics Inc-EMC Div", Operating Force=160gf, Operating Temperature="-25°C ~ 70°C", Supplier Part Number 1=SW836CT-ND, Actuator Height off PCB, Vertical=4.30mm, Actuator Orientation="Top Actuated", Actuator Type=Standard, Circuit=SPST-NO, ComponentLink1Description=Datasheet, ComponentLink1URL=https://omronfs.omron.com/en_US/ecb/products/pdf/en-b3s.pdf, ComponentLink2Description="DigiKey Link", ComponentLink2URL=http://digikey.com/product-detail/en/omron-electronics-inc-emc-div/B3S-1000P/SW836CT-ND/700012, Features="Sealed - Fully", Illumination=Non-Illuminated, Ingress Protection="IP67 - Dust Tight, Waterproof", LastUpdated="31/01/2020 1:36:13 AM", Lifecycle Status=Active, Minimum Order=1, Mounting Type="Surface Mount", Outline="6.60mm x 6.00mm", Packaging=TapeAndReel, Part Number=B3S-1000P, Part Status=Active, Price=0.39, Series=B3S, Supplier 1=DigiKey, Switch Function=Off-Mom, Termination Style="Gull Wing"
SW1 SW2 SW3 SW4: "EP Series Sealed Pushbutton Switches", ComponentLink1Description="Manufacturer Link", ComponentLink1URL=http://www.ck-components.com/, ComponentLink2Description=Datasheet, ComponentLink2URL=http://www.ck-components.com/media/pdf/catalogs/Tactile_Switches%5CKSS_series_Tactile_August_2007.pdf, DatasheetVersion=Aug-2007, PackageDescription="Subminiature SMT Side Actuated Switch, Body 7 x 3.5 mm (LxW)", PackageReference=KSS-2G, PackageVersion=Aug-2007, PCB_Layout="Complies with manufacturer's recommendation.", Published=14-Mar-2008, Publisher="Altium Limited"
U1: "32-bit Coldfire Freescale MCU", Supplier Part Number 1=568-14492-ND, Supplier 1=Digi-Key
U2: library part CMP-0066-00198-3, "Multi-Gain Analog Temperature Sensor, 5-pin SC-70", Manufacturer="Texas Instruments", PackageTopMarking=21B*XTT, PowerWise=Y, Code_IPC=SOT353-5, Code_JEDEC=MO-203-AA, Code_JEITA=SC-88A, ComponentLink1Description="Datasheet URL", ComponentLink1URL=http://www.ti.com/general/docs/lit/getliterature.tsp?genericPartNumber=LM94021&fileType=pdf, CompType="Temp Sensor IC", PackageDescription="Molded SC-70, 2 x 1.25 x .9mm, 5 Lead, 0.65mm Pitch", PackageReference=DCK0005A, PinCount=5, RoHS=N
U5 U6: "+/- 25 kPa Differential Pressure Sensor"
U7: library part Optoisolator, "6Pin Optocoupler", DatasheetVersion=Apr-2004, LatestRevisionDate=04-Mar-2005, LatestRevisionNote="PCB Footprint replaced, Sch pins re-numbered.", PackageDescription="Small Outline; 6 Leads (1 Absent); Body Width 4.4 mm; Pitch 1.27 mm", PackageReference=SOP5(6), Published=24-Mar-1999, Publisher="Altium Limited"
U8: library part CMP-0062-00617-5, "3A Low Dropout Positive Regulators, 3-pin TO-263, Pb-Free", Manufacturer="Texas Instruments", PackageTopMarking=NSUZXYTTE#*LM1085*IS-5.0, PowerWise=N, Code_JEDEC=MO-169-AA, ComponentLink1Description="Datasheet URL", ComponentLink1URL=http://www.ti.com/general/docs/lit/getliterature.tsp?genericPartNumber=LM1085&fileType=pdf, CompType="LDO IC", High-Reliability=Y, PackageDescription="TO-263, Molded, .400 x .390 x .180in, 3 Lead, .1in Pitch, Surface Mount", PackageReference=KTT0003B, PartNumber=LM1085ISX-5.0/NOPB, PinCount=3, RoHS=Y
U9: library part CMP-0244-00307-1, "Fixed Low Drop Positive Voltage Regulator, 3.3V, 4-Pin SOT-223, Tape and Reel", ComponentLink1Description="Manufacturer URL", ComponentLink1URL=http://www.st.com, ComponentLink2Description=Datasheet, ComponentLink2URL=http://www.st.com/internet/com/TECHNICAL_RESOURCES/TECHNICAL_LITERATURE/DATASHEET/CD00000544.pdf, DatasheetVersion=1/11/2011, PackageDescription="4-Pin SOT-223 Package, 6.5 x 3.5 mm Body, 2.3 mm Pitch, 7 mm Lead Span", PackageReference=SOT-223, PackageVersion=2010
X1: library part CMP-2000-06128-1, "Crystal, 16 MHz, 8 pF, -10 to 70 degC, 4-Pin SMD, RoHS, Tape and Reel", Frequency=16MHz, Frequency Stability=15PPM, Load Capacitance=8pF, Manufacturer=AVX, Operating Temperature Range=-10Cto+70C, Package / Case=2.5mmx2mm, Package Description="4-Pin Surface Mount Device, Body 2.5 x 2 mm, Pitch 1.7 mm", Package Reference=CX2520DB, Brand=AVX/Kyocera, Datasheet URL=http://www.kyocera-crystal.jp/eng/wp-content/uploads/2014/12/cx2520db_e.pdf, Datasheet Version=09/2015, Drive Level=10uW, ESR=80Ohms, Factory Pack Quantity=3000, Height=0.5mm, Length=2.5mm, Manufacturer URL=http://global.kyocera.com/, Mounting Style=SMD/SMT, Mounting Technology=SurfaceMount, Packaging=Reel, Product Category=Crystals, Qualification=AEC-Q200, RoHS=True, Series=CX2520DB, Termination Style=SMD/SMT, Tolerance=15PPM, Type=SMDCrystal, Unit Weight=0.000459oz, Width=2mm

## Free pads (board coordinates)
  round 4 hole 3.175 paste+0: 1(3,3) 2(118,3) 3(118,68) 4(3,68)
  round 3.5 hole 2.5 paste+0: 5(15.6,13.295) 6(108.6,13.295) 7(108.6,68.295) 8(15.64,68.326)

## Via types
v1: diameter 0.45, hole 0.2, Top Layer to Bottom Layer, 136 vias
v2: diameter 0.66, hole 0.406, Top Layer to Bottom Layer, 5 vias

## Nets (pads, with @x,y where several pads share a name; then routed paths per layer and width w, separated by ;. In a path a pad name is that pad's centre, name@x,y a point inside that pad or via, vN(x,y) a via of type N, cw(c..) or ccw(c..) an arc to the next point about the centre after c; other vN are vias at no path point)
3VDPS: R16.1 R21.2 U1.11 | length 47.4
  Top Layer w0.2: U1.11@64.25,37 68.242,37 68.647,37.405 72.405,37.405 77,42 95.5,42 100.126,37.374 R16.1@105.7,37.374 ; R21.2@105.783,35.427 105.8,35.444 105.8,37.366 R16.1@105.792,37.374
3VDPS2: R23.1 R25.2 U1.14 | length 51.5
  Top Layer w0.2: U1.14@64.25,38.5 69.25,38.5 71.25,40.5 74,40.5 91.3,57.8 R25.2@105.75,57.8 ; R23.1@105.759,59.776 105.759,57.809 R25.2@105.75,57.8 ; R25.2@105.8,57.8 R25.2@105.75,57.8